# Altium PCB driver.PcbDoc
Units mil, origin at the board's own origin, x right, y up, seen from the top; angles counter-clockwise.
Board outline 1335 x 780 mil, 2 copper layers (Top Layer, Bottom Layer); 9 components, 6 nets, 23 pads, 0 vias.
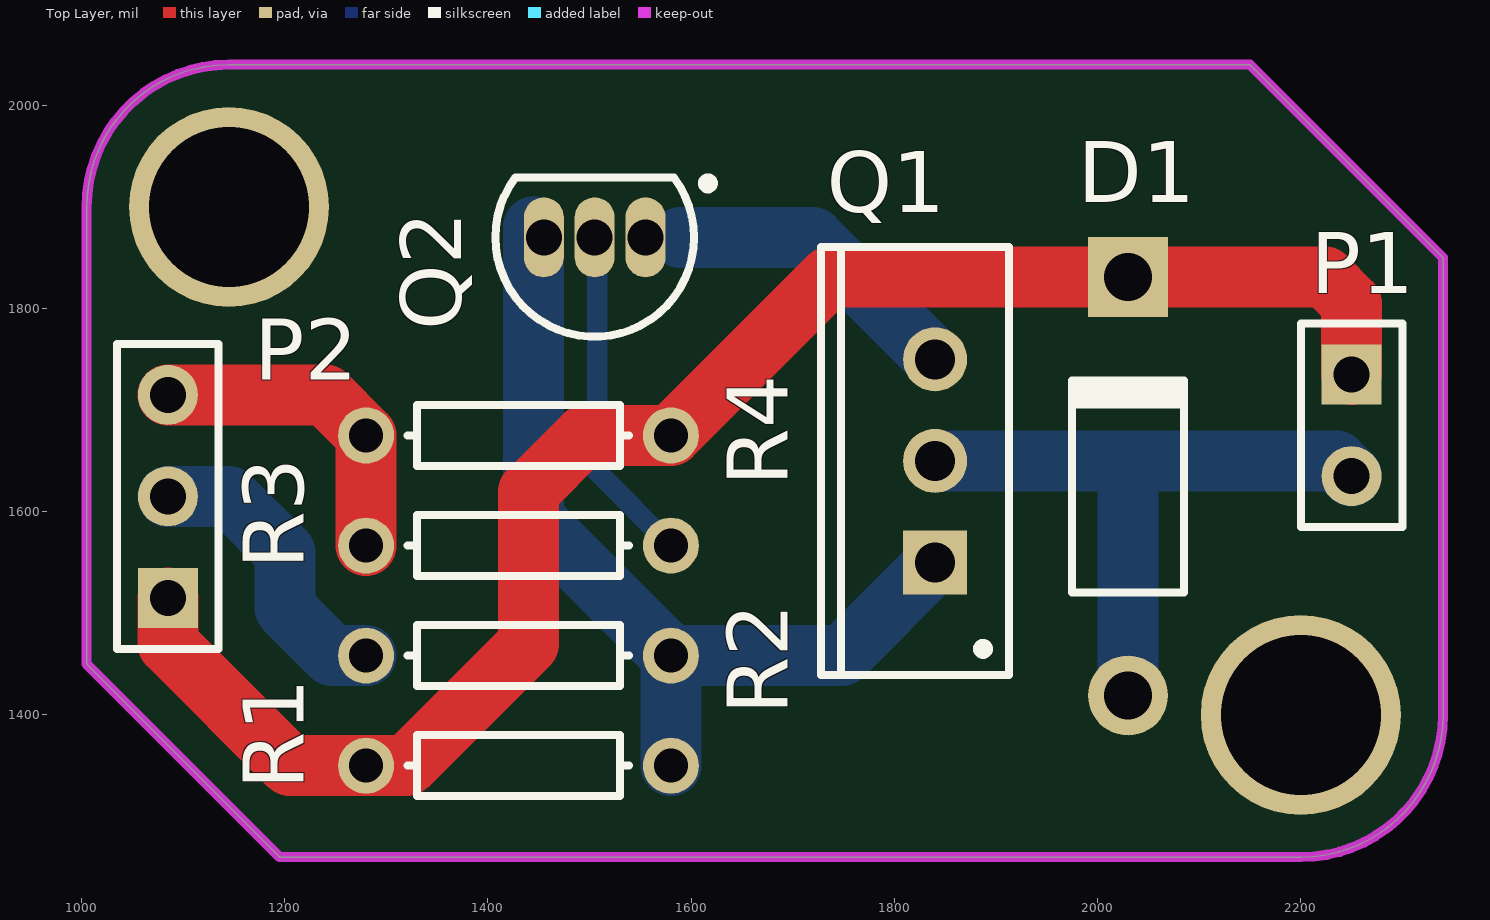
[diagram p0: Top Layer view]
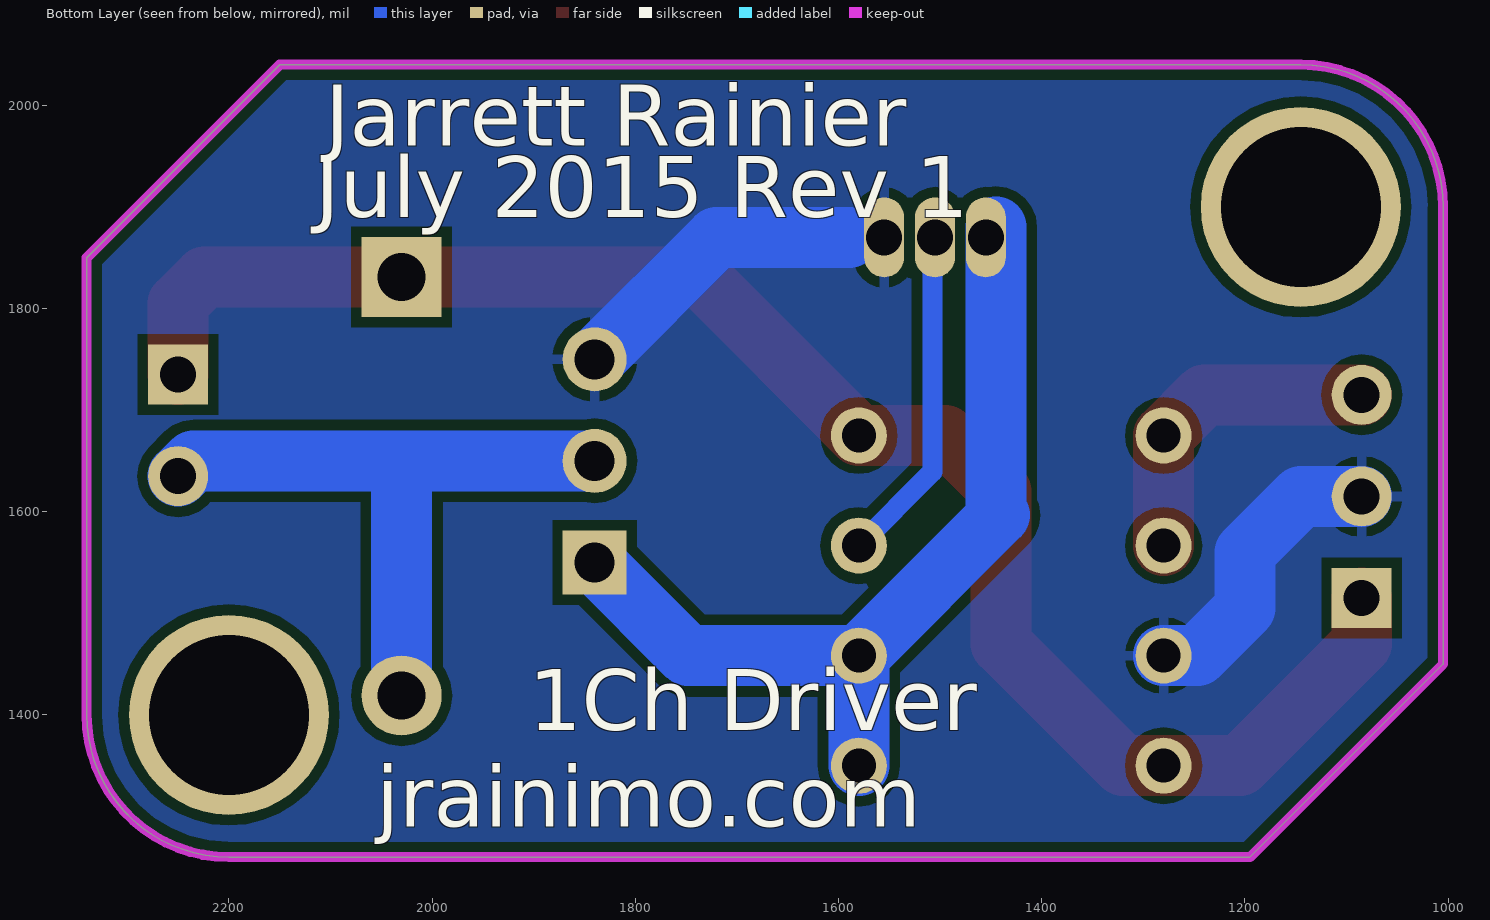
[diagram p1: Bottom Layer view, seen from below]

## Layer stack, top to bottom
Top Layer: signal copper 1.4
Dielectric: dielectric 12.6, FR-4, Dk 4.8
Bottom Layer: signal copper 1.4

## Board outline
1005,1450 1005,1900 cw(c1145,1900) 1145,2040 2150,2040 2340,1850 2340,1400 cw(c2200,1400) 2200,1260 1195,1260

## Design rules (kind name [scope] priority, off if disabled: settings)
Clearance [All] p1: gap=10
PolygonConnect [All] p1: connectstyle=Relief reliefconductorwidth=10 reliefentries=4 polygonreliefangle="90 Angle"
RoutingVias [All] p1: holewidth=28 width=50 viastyle="Through Hole" minholewidth=28 minwidth=50 maxholewidth=28 maxwidth=50
SilkscreenOverComponentPads [All] p1: minsilkscreentomaskgap=10
SolderMaskExpansion [All] p1: expansion=4
Width [All] p1: maxlimit=60 minlimit=10 preferedwidth=60
27 further rules are at their usual default settings.

## Components (designator, comment, footprint, x,y, rotation, side; value= is the part's Value field where it differs from the comment)
D1 "Diode 1N4007" DO-41 2030,1625 r90 top
P1 "Header 2" HDR1X2 2250,1735 r270 top
P2 "Header 3" HDR1X3 1085,1515 r90 top
Q1 "IRF540N" TO-220AB 1840,1650 r90 top
Q2 "2N3904" TO-92A 1505,1870 r90 top
R1 "Res1" AXIAL-0.3 1430,1350 r180 top
R2 "Res1" AXIAL-0.3 1430,1458.33 r0 top
R3 "Res1" AXIAL-0.3 1430,1566.67 r180 top
R4 "Res1" AXIAL-0.3 1430,1675 r0 top

## Footprints (in the part's own frame and the unit in brackets; to place one, negate y for a bottom-side part, rotate by r counter-clockwise, add the part's x,y. Pads: shape width x height; smd on the part's side, far side on the other; paste and mask are expansions set on the pad)
AXIAL-0.3 [mm] "Axial Device, Thru-Hole; 2 Leads; 0.3 in Pin Spacing"
  round 1.4 hole 0.85: 1(-3.81,0) 2(3.81,0)
  silkscreen extent -2.77,-0.76 2.77,0.76
DO-41 [mm] "Diode, Axial; Body 5.2 x 2.7 mm (LxDia. max), Lead Dia. 0.86 mm (max)"
  round 2 hole 1.2: 1(-5.23,0)
  rect 2x2 hole 1.2: 2(5.23,0)
  silkscreen extent -2.65,-1.41 2.75,1.4
HDR1X2 [mm] "Connector; Header; 2 Position"
  rect 1.5x1.5 hole 0.9: 1(0,0)
  round 1.5 hole 0.9: 2(2.54,0)
  silkscreen extent -1.27,-1.27 3.81,1.27
HDR1X3 [mm] "Connector; Header; 3 Position"
  rect 1.5x1.5 hole 0.9: 1(0,0)
  round 1.5 hole 0.9: 2(2.54,0) 3(5.08,0)
  silkscreen extent -1.27,-1.27 6.35,1.27
TO-92A [mm] "TO, Flat Index; 3 In-Line, Axial Leads; Body Dia. 4.5mm; Leads 0.51 x 0.48 mm (max)"
  oval 2x1 hole 0.9: 1(0,-1.27) 2(0,0) 3(0,1.27)
  silkscreen extent -2.48,-2.96 1.5,2.48, body extent -2.5,-2.5 1.5,2.5, height 6.86
TO-220AB [mm] "TO, Thru-Hole, Vertical, Heatsink Mounted; 3 In-Line Leads; Pitch 2.54 mm"
  rect 1.6x1.6 hole 1: 1(-2.54,0)
  round 1.6 hole 1: 2(0,0) 3(2.54,0)
  silkscreen extent -5.35,-1.85 5.35,2.85, body extent -5.4,-1.9 5.4,2.9, height 19.3

## Part data
D1: "1 Amp General Purpose Rectifier"
P1: "Header, 2-Pin"
P2: "Header, 3-Pin"
Q1: "HEXFET Power MOSFET"
Q2: "NPN General Purpose Amplifier"
R1 R2 R3 R4: "Resistor"

## Free pads (board coordinates)
  round 196.85 hole 157.48 paste+0: 0(1145,1900) 0(2200,1400)

## Nets (pads, with @x,y where several pads share a name; then routed paths per layer and width w, separated by ;. In a path a pad name is that pad's centre, name@x,y a point inside that pad or via, vN(x,y) a via of type N, cw(c..) or ccw(c..) an arc to the next point about the centre after c; other vN are vias at no path point)
GND: P2.2 Q1.3 Q2.1 R2.1 | length 592.1
  Bottom Layer w60: P2.2 1145,1615 1200,1560 1200,1505 1246.67,1458.33 R2.1 ; 1589.68,1870 1720,1870 Q1.3
NetD1_1: D1.1 P1.2 Q1.2 | length 647.1
  Bottom Layer w60: Q1.2 2030,1650 ; D1.1 2030,1650 ; P1.2 2235,1650 2030,1650
NetP2_3: P2.3 R3.2 R4.1 | length 319.9
  Top Layer w60: P2.3 1240,1715 R4.1 R3.2
NetQ1_1: Q1.1 Q2.3 R1.1 R2.2 | length 885.3
  Bottom Layer w60: 1441.67,1596.67 R2.2 ; 1445,1596.67 Q2.3@1445,1880 ; R1.1 R2.2 ; Q1.1 1748.33,1458.33 R2.2
NetQ2_2: Q2.2 R3.1 | length 333.4
  Bottom Layer w20: Q2.2@1507.5,1870 1507.5,1639.17 R3.1
VIN: D1.2 P1.1 P2.1 R1.2 R4.2 | length 1627.5
  Top Layer w60: P2.1 1085,1470 1205,1350 R1.2 1320,1350 1440,1470 1440,1620 1495,1675 R4.2 1735.91,1830.91 D1.2 2224.09,1830.91 2250,1805 P1.1

## Polygon pours and split planes (outlines as drawn)
GND on Bottom Layer "Bottom Layer-No Net" (solid, pour order 2): 1195,1260 2200,1260 2245,1260 2340,1355 2340,1850 2150,2040 1135,2040 1105,2040 1010,1945 1005,1940 1005,1450 1195,1260

## Keep-outs
Keep-Out Layer:
  the board outline again, w10

## Silkscreen, mask and mechanical layers (free items; w line width, h text height)
Bottom Overlay:
  text "Jarrett Rainier" at 2105,1960 h60
  text "July 2015 Rev 1" at 2115,1890 h60
  text "1Ch Driver" at 1905,1385 h60
  text "jrainimo.com" at 2055,1290 h60